# EAGLE board NextBluetooth_v1 (EAGLE 7.3.0)
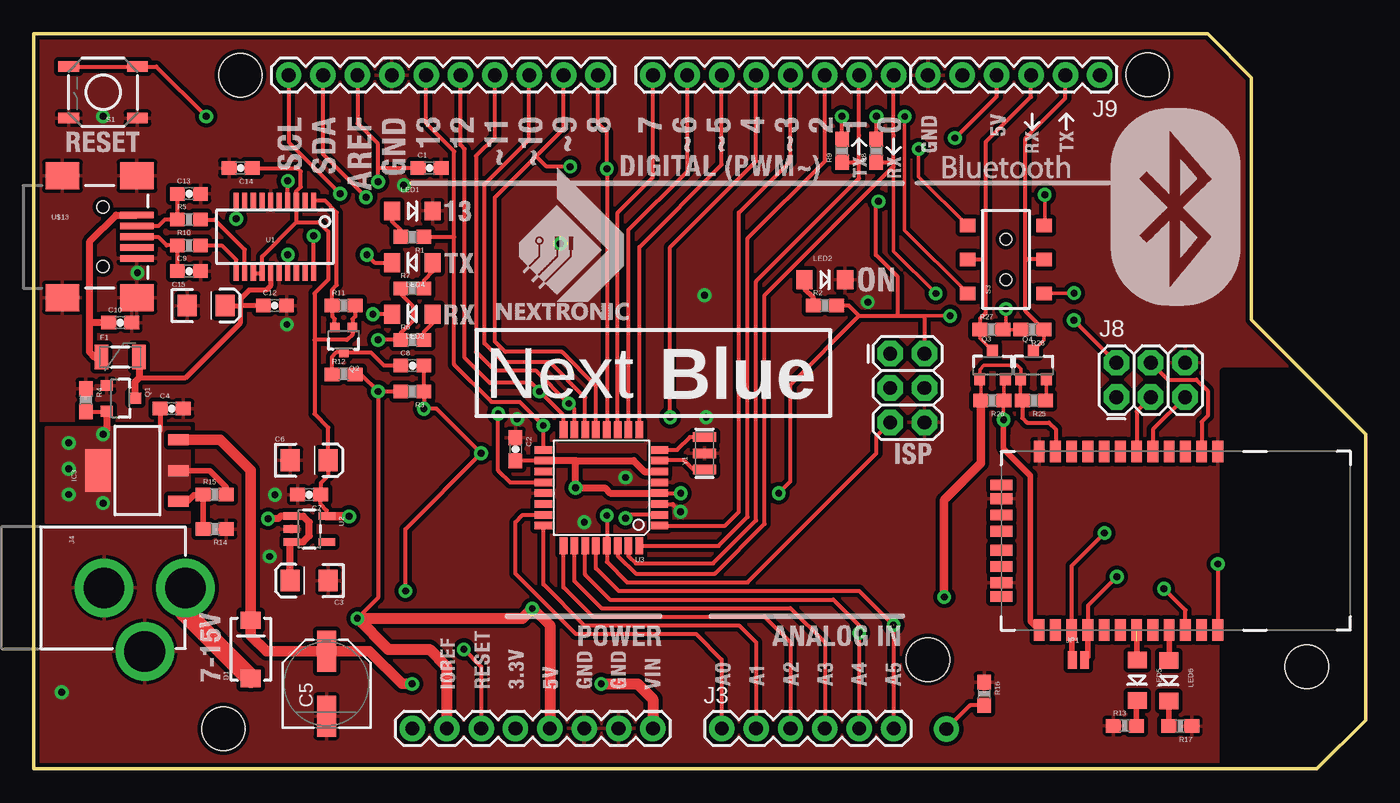
[diagram p0: board, top side]
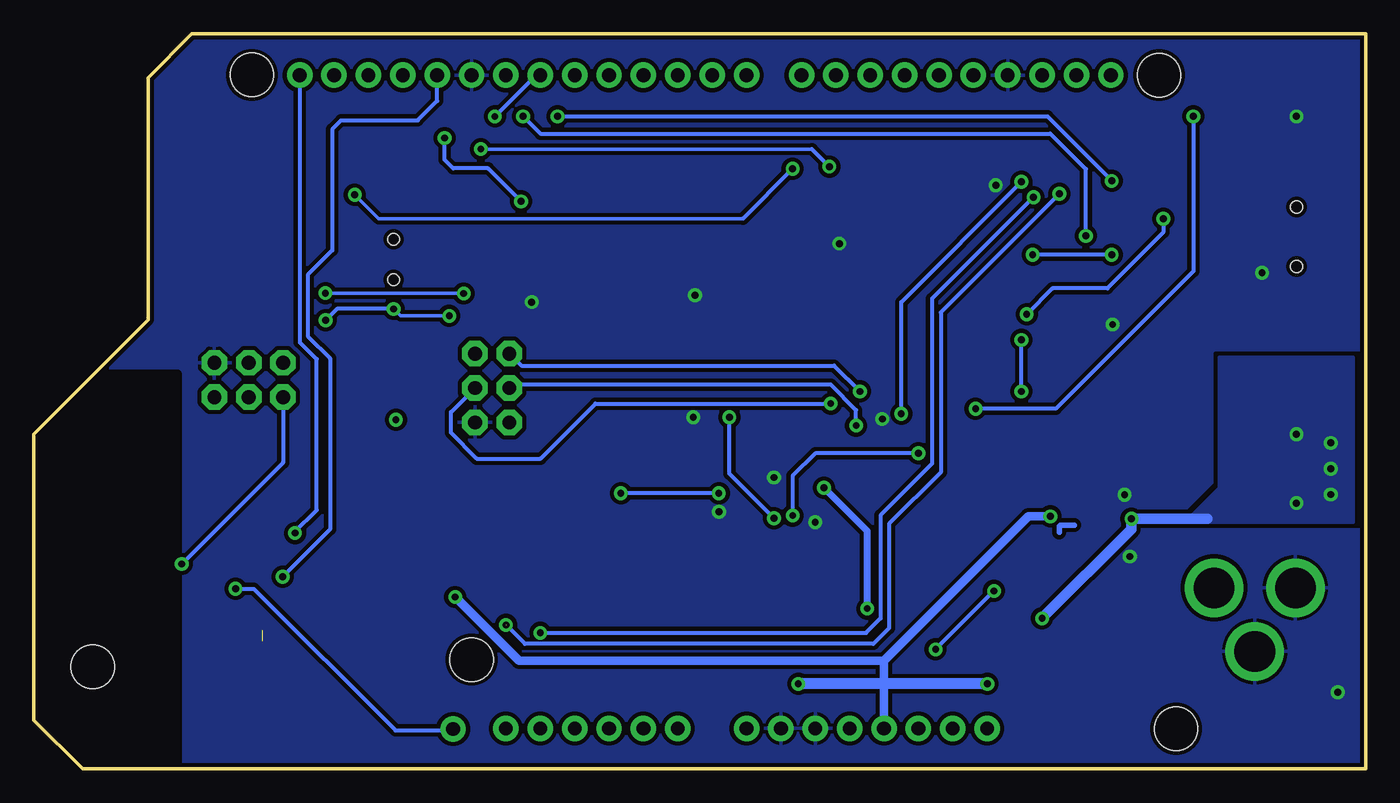
[diagram p1: board, bottom side, seen from below]

Size 98.42 x 54.31 mm. Coordinates in mm from the lower left corner, seen from the top.
Outline: 0.04,54.3 64.55,54.3
Outline: 64.57,54.31 86.74,54.31 89.97,51.08 89.97,33.2 98.42,24.74 98.42,3.61 94.82,0 0.03,0
Outline: 0,0 0,54.31 0.03,54.31
Copper layers (1*16): Top 0.035mm / dielectric 1.5mm / Bottom 0.035mm
Design rules "SparkFun-2-layer": minimum track width 7mil, minimum drill 15mil, track to track 8mil, track to pad 8mil, pad to pad 8mil, via to via 8mil, smd to smd 8mil, copper to edge 8mil, drill to drill 8mil, minimum pad ring 12mil, minimum via ring 10mil, stop-mask expansion 4mil, vias tented up to drill 20mil, thermal gap 10mil
Holes 3.2 mm at 82.31,51.28 94.07,7.54 66.08,8.07 15.28,51.25 14.01,2.97
tRestrict: area 87.9,-1.1 to 100.1,29.3
bRestrict: area 87.8,-0.6 to 99.5,29.2
vRestrict: area 0.7,22.3 to 2.1,30.6; area 5.8,23.1 to 7.4,30.6; area 47.9,10.7 to 48.5,11.2; area 50.5,10.6 to 51,11.5; area 11.3,29.3 to 12.7,31.6; area 0.3,12.9 to 9.4,25

## Footprints (pad centres in the part's own frame; a part is rotated, then mirrored left to right if it is on the bottom)
0603-CAP = smd 1.1 x 1: 1 -0.85,0; 2 0.85,0
EIA3216 = smd 1.4 x 1.6: A 1.4,0; C -1.4,0
PANASONIC_D = smd 3 x 1.4: + 2.4,0; - -2.4,0
0603-CAP@1 = smd 1.1 x 1: 1 -0.85,0; 2 0.85,0
SMA-DIODE = smd 1.27 x 1.47: A -2.15,0; C 2.15,0
PTC-1206 = smd 1 x 1.8: 1 -1.4,0; 2 1.4,0
SOT223-ALT1 = smd 0.813 x 1.524: 1 -2.271,-3.02; 2 0,-3.02; 3 2.288,-3.02 | smd 3.124 x 1.905: 4 0,2.921
1X10 = drill 1.016 pad 1.88: 1 0,0; 2 2.54,0; 3 5.08,0; 4 7.62,0; 5 10.16,0; 6 12.7,0; 7 15.24,0; 8 17.78,0; 9 20.32,0; 10 22.86,0
2X3 = drill 1.016 pad 1.88 octagon: 1 0,0; 2 0,2.54; 3 2.54,0; 4 2.54,2.54; 5 5.08,0; 6 5.08,2.54
1X06 = drill 1.016 pad 1.88: 1 0,0; 2 2.54,0; 3 5.08,0; 4 7.62,0; 5 10.16,0; 6 12.7,0
POWER_JACK_PTH = drill 2.997 pad 4.318: GND 0,7.7; GNDBREAK 4.7,10.7; PWR 0,13.7
1X08_ROUND = drill 1.016 pad 1.88: 1 0,0; 2 2.54,0; 3 5.08,0; 4 7.62,0; 5 10.16,0; 6 12.7,0; 7 15.24,0; 8 17.78,0
1X01NS-KIT = drill 1.016 pad 1.88: 1 0,0
PAD-JUMPER-2-NO_NO_SILK = smd 0.635 x 1.27: 1 -0.45,0; 2 0.45,0
LED-1206-NO_SILK = smd 1.2 x 1.4: A -1.5,0; C 1.5,0
SOT23-3 = smd 0.8 x 0.9: 1 -0.95,-1; 2 0.95,-1; 3 0,1.1
SOT323 = smd 0.7 x 0.7: 1 -0.65,-0.925; 2 0.65,-0.925; 3 0,0.925
0603-RES = smd 1.1 x 1: 1 -0.85,0; 2 0.85,0
0603-RES@2 = smd 1.1 x 1: 1 -0.85,0; 2 0.85,0
TACTILE_SWITCH_SMD = smd 1.524 x 0.762: 1 -2.54,1.905; 2 2.54,1.905; 3 -2.54,-1.905; 4 2.54,-1.905
AYZ0202 = smd 1 x 1.15: 1 -2.5,2.825; 2 0,2.825; 3 2.5,2.825; 4 -2.5,-2.825; 5 0,-2.825; 6 2.5,-2.825 | hole 0.85: 1.5,0; -1.5,0
SSOP20_L = smd 0.381 x 1.143: 1 -2.857,-2.68; 2 -2.223,-2.68; 3 -1.587,-2.68; 4 -0.953,-2.68; 5 -0.318,-2.68; 6 0.318,-2.68; 7 0.953,-2.68; 8 1.587,-2.68; 9 2.223,-2.68; 10 2.857,-2.68; 11 2.857,2.68; 12 2.223,2.68; 13 1.587,2.68; 14 0.953,2.68; 15 0.318,2.68; 16 -0.318,2.68; 17 -0.953,2.68; 18 -1.587,2.68; 19 -2.223,2.68; 20 -2.857,2.68
SOT23-5 = smd 0.55 x 1.2: 1 -0.95,-1.3; 2 0,-1.3; 3 0.95,-1.3; 4 0.95,1.3; 5 -0.95,1.3
TQFP32-08 = smd 1.27 x 0.559: 1 -4.293,2.8; 2 -4.293,2; 3 -4.293,1.2; 4 -4.293,0.4; 5 -4.293,-0.4; 6 -4.293,-1.2; 7 -4.293,-2; 8 -4.293,-2.8; 17 4.293,-2.8; 18 4.293,-2; 19 4.293,-1.2; 20 4.293,-0.4; 21 4.293,0.4; 22 4.293,1.2; 23 4.293,2; 24 4.293,2.8 | smd 0.559 x 1.27: 9 -2.8,-4.293; 10 -2,-4.293; 11 -1.2,-4.293; 12 -0.4,-4.293; 13 0.4,-4.293; 14 1.2,-4.293; 15 2,-4.293; 16 2.8,-4.293; 25 2.8,4.293; 26 2,4.293; 27 1.2,4.293; 28 0.4,4.293; 29 -0.4,4.293; 30 -1.2,4.293; 31 -2,4.293; 32 -2.8,4.293
RN41 = smd 0.8 x 1.6: 1 -6.6,-6.6; 2 -5.4,-6.6; 3 -4.2,-6.6; 4 -3,-6.6; 5 -1.8,-6.6; 6 -0.6,-6.6; 7 0.6,-6.6; 8 1.8,-6.6; 9 3,-6.6; 10 4.2,-6.6; 11 5.4,-6.6; 12 6.6,-6.6; 13 6.6,6.6; 14 5.4,6.6; 15 4.2,6.6; 16 3,6.6; 17 1.8,6.6; 18 0.6,6.6; 19 -0.6,6.6; 20 -1.8,6.6; 21 -3,6.6; 22 -4.2,6.6; 23 -5.4,6.6; 24 -6.6,6.6 | smd 1.6 x 0.8: 28 9.4,3.1; 29 9.4,-3.1; 30 9.4,4.122; 31 9.4,1.9; 32 9.4,0.7; 33 9.4,-0.7; 34 9.4,-1.9; 35 9.4,-4.122
USB-MINIB = smd 2.5 x 0.5: D+ 2.5,0; D- 2.5,0.8; GND 2.5,-1.6; ID 2.5,-0.8; VBUS 2.5,1.6 | smd 2.5 x 2: MTN1 -3,4.5; MTN2 2.5,4.5; MTN3 -3,-4.5; MTN4 2.5,-4.5 | hole 0.9: 0,2.2; 0,-2.2
RESONATOR-SMD = smd 0.7 x 1.7: 1 -1.2,0; 2 0,0; 3 1.2,0

## Placement (x,y rotation side)
C1  0.1uF  [0603-CAP]  29.25,44.39 0 top
C2  0.1uF  [0603-CAP]  35.6,23.62 270 top
C3  10uF  [EIA3216]  20.36,13.91 180 top
C4  0.1uF  [0603-CAP]  10.2,26.61 0 top
C5  47uF  [PANASONIC_D]  21.63,6.29 90 top
C6  10uF  [EIA3216]  20.36,22.8 0 top
C7  1uF  [0603-CAP]  20.36,20.26 180 top
C8  0.1uF  [0603-CAP]  27.98,29.79 0 top
C9  47pF  [0603-CAP@1]  11.47,36.77 0 top
C10  0.1uF  [0603-CAP]  6.39,32.96 0 top
C12  0.1uF  [0603-CAP]  17.82,34.23 0 top
C13  47pF  [0603-CAP@1]  11.47,42.49 0 top
C14  0.1uF  [0603-CAP]  15.28,44.39 180 top
C15  10uF  [EIA3216]  12.74,34.23 0 top
D1  MBRA140  [SMA-DIODE]  16.04,8.83 90 top
F1  500mA  [PTC-1206]  6.39,30.42 0 top
FRAME1  FRAME-LETTER  [CREATIVE_COMMONS]  -24.45,-9.76 0 top  (outside the outline)
IC3  LM1117  [SOT223-ALT1]  7.66,22.04 90 top
J1  [1X10]  41.69,51.25 180 top
J2  ICSP  [2X3]  63.28,30.68 270 top
J3  [1X06]  50.84,2.99 0 top
J4  POWER_JACKPTH  [POWER_JACK_PTH]  -2.5,13.38 270 top
J5  [1X08_ROUND]  63.54,51.25 180 top
J6  [1X01NS-KIT]  67.44,2.95 0 top
J7  [1X08_ROUND]  27.98,2.99 0 top
J8  ICSP  [2X3]  80,27.47 0 top
J9  [1X06]  78.78,51.25 180 top
JP1  JUMPER-PAD-2-NO  [PAD-JUMPER-2-NO_NO_SILK]  77.2,8.05 0 top
LED1  Blue  [LED-1206-NO_SILK]  27.98,41.22 0 top
LED2  Green  [LED-1206-NO_SILK]  58.46,36.14 0 top
LED3  Red  [LED-1206-NO_SILK]  27.98,33.6 180 top
LED4  Yellow  [LED-1206-NO_SILK]  27.98,37.41 180 top
LED5  Green  [LED-1206-NO_SILK]  81.54,6.55 270 top
LED6  Red  [LED-1206-NO_SILK]  83.87,6.52 270 top
Q1  ZXMP6A13FTA  [SOT23-3]  6.39,27.38 270 top
Q2  2N7002PW  [SOT323]  22.9,31.69 180 top
Q3  BSS138  [SOT23-3]  70.85,29.79 0 top
Q4  BSS138  [SOT23-3]  73.87,29.79 0 top
R1  1k  [0603-RES]  27.98,39.31 180 top
R2  1k  [0603-RES]  58.46,34.23 0 top
R3  10k  [0603-RES]  27.98,27.88 180 top
R4  10k  [0603-RES]  3.85,27.25 270 top
R5  27  [0603-RES]  11.47,40.58 0 top
R6  1k  [0603-RES]  27.98,31.69 0 top
R7  1k  [0603-RES]  27.98,35.5 0 top
R8  1k  [0603-RES]  62.27,45.66 90 top
R9  1k  [0603-RES]  59.73,45.66 90 top
R10  27  [0603-RES]  11.47,38.68 0 top
R11  10k  [0603-RES]  22.9,34.23 0 top
R12  10k  [0603-RES]  22.9,29.15 0 top
R13  240  [0603-RES]  80.63,3.19 0 top
R14  715  [0603-RES]  13.37,17.72 180 top
R15  240  [0603-RES]  13.37,20.26 0 top
R16  10K  [0603-RES]  70.23,5.55 270 top
R17  240  [0603-RES]  84.72,3.16 180 top
R25  10K  [0603-RES@2]  73.9,27.22 180 top
R26  10K  [0603-RES@2]  70.83,27.22 180 top
R27  10K  [0603-RES@2]  70.77,32.46 0 top
R28  10K  [0603-RES@2]  73.8,32.46 180 top
S1  RESET  [TACTILE_SWITCH_SMD]  5.12,49.98 180 top
S3  DPDT  [AYZ0202]  71.84,37.64 90 top
U1  FT231XS  [SSOP20_L]  17.82,39.31 180 top
U2  MIC5205  [SOT23-5]  20.36,17.72 270 top
U3  ATMEGA328  [TQFP32-08]  41.95,20.77 180 top
U$9  BLUETOOTH-RN41"  [RN41]  80.9,16.86 180 top
U$13  USB-MINIB-5PIN  [USB-MINIB]  5.12,39.31 0 top
Y1  16MHz  [RESONATOR-SMD]  49.57,23.31 90 top

## Library data of the parts
C1 C2 C4 C8 C10 C12 C14 = SparkFun; MF: WALSIN; MPN: 0805B104K500CT; OC_FARNELL: 2496944
C3 C6 = SparkFun; MF: MULTICOMP; MPN: MCSH21B104K101CT; OC_FARNELL: 1856515
C5 = SparkFun; MF: PANASONIC ELECTRONIC COMPONENTS; MPN: EEEFT1H470AP; OC_FARNELL: 1868425
C7 = SparkFun; MF: PANASONIC ELECTRONIC COMPONENTS; MPN: ECA2GHG2R2; OC_FARNELL: 9693327
C9 C13 = SparkFun-Capacitors; MF: AVX; MPN: 08051A470JAT2A; OC_FARNELL: 499160; PROD_ID: CAP-08913
C15 = SparkFun-Capacitors; MF: MULTICOMP; MPN: MCSH21B104K101CT; OC_FARNELL: 1856515
D1 = SparkFun; MF: DIODES INC.; MPN: B140-13-F; OC_FARNELL: 1843670
F1 = SparkFun; MF: MULTICOMP; MPN: 1N4148.; OC_FARNELL: 9565124
FRAME1 = SparkFun-Aesthetics; OC_FARNELL: unknown
IC3 = Testing; MF: STMICROELECTRONICS; MPN: LD1117S33TR; OC_FARNELL: 1202826
J1 = SparkFun-Connectors; OC_FARNELL: unknown; PROD_ID: CONN-11563
J2 J6 J8 U$13 = SparkFun-Connectors; OC_FARNELL: unknown
J3 J5 J7 J9 = SparkFun-Connectors; OC_FARNELL: unknown; PROD_ID: CONN-08437
J4 = SparkFun-Connectors; OC_FARNELL: unknown; PROD_ID: CONN-08197
JP1 = SparkFun-Passives; OC_FARNELL: unknown
LED1-LED3 LED5 LED6 = SparkFun-LED; MF: MULTICOMP; MPN: 703-1028; OC_FARNELL: 2112143
LED4 = SparkFun-LED; MF: VISHAY; MPN: TLUY2401; OC_FARNELL: 1045498
Q1 = SparkFun; MF: DIODES INC.; MPN: ZXMP6A13FTA; OC_FARNELL: 1843770
Q2 = SparkFun-DiscreteSemi; MF: NXP; MPN: 2N7002PW; OC_FARNELL: 1829184; PROD_ID: TRANS-11151
Q3 Q4 = SparkFun-DiscreteSemi; MF: NXP; MPN: BSS138PW; OC_FARNELL: 1907611; PROD_ID: TRANS-00830
R1 R2 R6-R9 = SparkFun; MF: PANASONIC ELECTRONIC COMPONENTS; MPN: ERA6AEB102V; OC_FARNELL: 1577659
R3 R4 R11 R12 = SparkFun; MF: MULTICOMP; MPN: MC0063W0603510K; OC_FARNELL: 9331700
R5 R10 = SparkFun-Resistors; MF: MOLEX; MPN: 22-27-2021; OC_FARNELL: 9731148
R13 R17 = SparkFun-Resistors; MF: MULTICOMP; MPN: MCMR06X2200FTL; OC_FARNELL: 2073428
R14 = SparkFun; MF: YAGEO (PHYCOMP); MPN: RC0603JR-07150RL; OC_FARNELL: 9233270
R15 = SparkFun; MF: MULTICOMP; MPN: MCMR06X2200FTL; OC_FARNELL: 2073428
R16 = SparkFun-Resistors; MF: SUSUMU; MPN: RR0816P-103-B-T5; OC_FARNELL: 1653253
R25-R28 = SparkFun-Resistors; MF: SUSUMU; MPN: RR0816P-103-B-T5; OC_FARNELL: 1653253; PROD_ID: RES-00824
S1 = SparkFun; OC_FARNELL: unknown
S3 = SparkFun-Electromechanical; OC_FARNELL: unknown; PROD_ID: SWCH-08179
U1 = SparkFun-DigitalIC; MF: FTDI; MPN: FT231XS; OC_FARNELL: 2081328RL
U2 = SparkFun; MF: MICREL SEMICONDUCTOR; MPN: MIC5205-5.0YM5 TR; OC_FARNELL: 1556768
U3 = SparkFun; MF: ATMEL; MPN: ATMEGA328P-AN; OC_FARNELL: 2443178
U$9 = SparkFun-RF; OC_FARNELL: unknown
Y1 = SparkFun-FreqCtrl; OC_FARNELL: unknown

## Nets
3.3V: C6.A C7.1 C14.1 J7.4 Q2.1 Q3.1 Q4.1 R11.2 R25.2 R26.2 U1.3 U1.13 U1.14 U2.5 U$9.11
5V: C2.2 C3.A C4.1 IC3.2 IC3.4 J2.2 J7.2 J7.5 J8.2 J9.4 Q1.2 R2.2 R3.2 R4.2 R6.1 R7.1 R12.2 R15.2 R27.2 R28.2 U2.1 U2.3 U3.4 U3.6 U3.18
AD0: J3.1 U3.23
AD1: J3.2 U3.24
AD2: J3.3 U3.25
AD3: J3.4 U3.26
AD4/SDA: J1.9 J3.5 U3.27
AD5/SCL: J1.10 J3.6 U3.28
AREF: C1.1 J1.8 U3.20
BLRXI: Q3.2 R26.1 U$9.13
BLTXO: Q4.2 R25.1
BTCTS: J9.5 JP1.2 U$9.16
BTMISO: J8.1 U$9.24
BTMOSI: J8.4 U$9.2
BTRESET: J8.5 U$9.5
BTRTS: J9.1 JP1.1 U$9.15
BTSCK: J8.3 U$9.6
BTTXO: U$9.14
D+: C9.1 R10.1 U$13.D+
D-: C13.1 R5.1 U$13.D-
DTR: C8.1 Q2.3 R12.1
GND: C1.2 C2.1 C3.C C4.2 C5.- C6.C C7.2 C9.2 C10.2 C12.2 C13.2 C14.2 C15.C J1.7 J2.6 J4.GND J4.GNDBREAK J7.6 J7.7 J8.6 J9.6 LED1.C LED2.C Q1.1 R4.1 R13.1 R14.1 R16.1 R17.1 S1.1 S1.2 U1.6 U1.16 U2.2 U3.3 U3.5 U3.21 U$9.1 U$9.12 U$9.28 U$9.29 U$13.GND U$13.MTN1 U$13.MTN2 U$13.MTN3 U$13.MTN4 Y1.2
IO2: J5.3 U3.32
IO3: J5.4 U3.1
IO4: J5.5 U3.2
IO5: J5.6 U3.9
IO6: J5.7 U3.10
IO7: J5.8 U3.11
IO8: J1.1 S3.6 U3.12
IO9: J1.2 S3.3 U3.13
MISO: J1.5 J2.1 U3.16
MOSI: J1.4 J2.4 U3.15
N$1: LED1.A R1.2
N$2: LED2.A R2.1
N$3: U3.7 Y1.1
N$4: U3.8 Y1.3
N$5: D1.A J4.PWR
N$6: R5.2 U1.12
N$7: R10.2 U1.11
N$8: LED3.A R6.2
N$10: LED4.A R7.2
N$11: U$9.23
N$12: Q2.2 R11.1 U1.1
N$15: IC3.1 R14.2 R15.1
N$17: U$9.7
N$18: U$9.8
N$19: U$9.9
N$20: U$9.10
N$21: U$9.18
N$22: U$9.17
N$23: U$9.34
N$24: U$9.33
N$25: U$9.32
N$26: U$9.31
N$27: U$9.4
N$28: U$9.3
N$29: LED6.A U$9.21
N$30: J6.1 R16.2 U$9.22
N$31: U$9.20
N$32: LED5.A U$9.19
N$33: U$9.30
N$34: U$9.35
N$35: LED5.C R13.2
N$36: LED6.C R17.2
RESET: C8.2 J2.5 J7.3 R3.1 S1.3 S1.4 U3.29
RX-I: J5.1 R8.1 S3.4 U3.30
RX_HIGH: J9.3 Q3.3 R27.1 S3.2
RXD: R9.2 U1.4
RXLED: LED4.C U1.17
SCK: J1.6 J2.3 R1.1 U3.17
SS: J1.3 U3.14
TX-O: J5.2 R9.1 S3.1 U3.31
TX_HIGH: J9.2 Q4.3 R28.1 S3.5
TXD: R8.2 U1.20
TXLED: LED3.C U1.10
USBVCC: C12.1 C15.A F1.2 Q1.3 U1.15
VIN: C5.+ D1.C IC3.3 J7.8
VUSB: C10.1 F1.1 U$13.VBUS

## Tracks (layer width: path | path; a pad name or v marks a point on that pad's centre or on a via)
3.3V  (via drill 0.5)
  Top 0.254: R26.2 69.98,28.71 Q3.1 69.9,29.5 70.22,29.81 72.68,29.81 72.93,29.56 Q4.1 72.92,27.35 R25.2
  Top 0.305: U2.5 21.66,19.09 21.21,19.54 C7.1 21.21,21.11 21.76,21.66 C6.A 21.76,25.21 20.74,26.23 20.74,31.69 | R11.2 23.75,33.43 23.55,33.23 Q2.1 23.55,32.09 23.15,31.69 20.74,31.69 | 19.4,40.39 U1.3 19.4,42.68 19.72,43 19.72,44.14 19.47,44.39 C14.1 | U1.13 U1.14 16.86,37.85 19.4,40.39 | 19.4,40.39 21.05,40.39 21.76,39.69 21.76,36.14 20.74,35.12 20.74,31.69 | R25.2 73.05,25.94 73.41,25.58 75.03,25.58 75.51,25.1 75.51,23.47 U$9.11
  Top 0.61: U2.5 23.29,18.67 v23.3,18.66 | R26.2 69.98,22.58 67.24,19.85 67.24,12.75 v67.28,12.71
  Bottom 0.61: v23.3,18.66 24.92,18.66 35.59,7.99 | 35.59,7.99 35.59,3 J7.4 | 35.59,7.99 62.57,7.99 v67.28,12.71
5V  (via drill 0.5, 0.51)
  Top 0.254: R28.2 R27.2 71.84,32.67 v71.84,33.98 | 65.82,33.47 v67.73,33.47
  Top 0.305: U3.18 C2.2 | U3.4 v47.81,20.37 | 61,33.47 63.84,33.47 | 63.84,33.47 65.82,33.47 J2.2 | 61,33.47 60.23,34.23 R2.2 | v55.05,20.37 55.92,21.24 55.92,28.39 61,33.47 | v25.44,27.88 25.44,12.64 v23.91,11.12 | v25.44,31.69 R6.1 27.13,32.24 27.98,33.09 27.98,34.23 27.13,35.08 R7.1 | v25.44,27.88 R3.2 | R4.2 5.36,26.4 Q1.2 | R12.2 24.17,29.15 v25.44,27.88 | 63.84,33.47 63.84,36.34 62.21,37.97 62.21,41.73 v62.42,41.93 | v68.07,46.61 71.16,49.69 J9.4 | v76.86,33.15 J8.2
  Top 0.356: C4.1 9.35,25
  Top 0.406: IC3.2 12.99,22.04 14.22,20.81 R15.2 | C3.A 19.09,13.91
  Top 0.508: U3.6 45.12,21.97 44.32,22.77 40.04,22.77 | 40.04,22.77 U3.18 | 40.04,22.77 v40.04,20.77 42.2,20.77 42.6,20.37 U3.4 | C3.A 18.96,16.67 U2.3 19.91,16.77 20.36,17.22 20.36,18.23 19.91,18.67 U2.1 18.26,18.67 18.07,18.49 v17.31,18.49 | Q1.2 5.39,24.99 v5.12,24.72
  Top 0.762: v36.84,11.85 36.84,11.91 38.14,10.61
  Top 0.813: v36.84,11.85 36.1,11.12 v23.91,11.12 26.2,8.83 29.25,8.83 30.52,7.56 J7.2 | 38.14,10.61 J7.5
  Bottom 0.254: v67.73,33.47 71.33,33.47 v71.84,33.98
  Bottom 0.305: v47.81,20.37 v55.05,20.37 | v25.44,27.88 v25.44,31.69 | v62.42,41.93 64.86,44.37 67.44,44.37 68.07,45.01 v68.07,46.61 | v71.84,33.98 76.03,33.98 v76.86,33.15
  Bottom 0.508: v36.84,11.85 36.84,17.57 v40.04,20.77
  Bottom 0.762: v17.31,18.49 11.72,18.49 | 16.55,18.49 v17.31,18.49 | v23.91,11.12 17.31,17.72 v17.31,18.49
  other vias: 2.58,22.18 5.12,19.64 2.58,20.28 2.58,24.09
  pour Bottom (isolate 0.305, no thermals): 0.92,30.42 10.83,30.42 10.83,20.77 12.74,18.87 12.74,18.23 0.92,18.23
  pour Top (isolate 0.305, no thermals): 0.92,18.23 0.92,25.22 11.47,25.22 11.47,18.23
AD0
  Top 0.305: U3.23 36.14,18.77 35.6,18.23 35.6,14.42 40.04,9.98 48.93,9.98 50.84,8.07 J3.1
AD1
  Top 0.305: U3.24 37.65,13.63 40.68,10.61 52.11,10.61 53.38,9.34 J3.2
AD2
  Top 0.305: U3.25 39.15,13.41 41.31,11.25 54.01,11.25 55.92,9.34 J3.3
AD3
  Top 0.305: U3.26 39.95,13.88 41.95,11.88 55.92,11.88 58.46,9.34 J3.4
AD4/SDA  (via drill 0.5, 0.51)
  Top 0.305: U3.27 40.75,14.35 42.58,12.52 59.09,12.52 61,10.61 v61,10.05 J3.5 | v24.55,42.24 21.37,45.41 J1.9
  Bottom 0.305: v24.55,42.24 32.04,34.74 32.04,22.55 35.85,18.74 35.85,11.12 36.92,10.05 v61,10.05
AD5/SCL  (via drill 0.5, 0.51)  (1 unrouted)
  Top 0.305: U3.28 41.55,14.82 43.22,13.15 61,13.15 63.54,10.61 | J1.10 18.83,46.3 v22.64,42.49 | v63.54,10.64 J3.6
  Bottom 0.305: v22.64,42.49 31.4,33.73 31.4,21.92 35.21,18.11 35.21,10.41 36.38,9.24 62.14,9.24 v63.54,10.64
AREF  (via drill 0.51)
  Top 0.305: U3.20 35.2,21.17 34.33,22.04 v34.33,26.23 | J1.8 23.91,47.7 25.44,46.17 25.44,44.39 | v25.44,43.38 25.44,44.39 | C1.1 25.44,44.39
  Bottom 0.305: v25.44,43.38 34.33,34.49 v34.33,26.23
BLRXI  (via drill 0.5)
  Top 0.254: 71.8,27.07 R26.1 | Q3.2 71.68,28.66 R26.1 | R26.1 71.66,27.21 v71.66,25.8
  Top 0.406: 71.66,24.86 v71.66,25.8 71.66,23.66 73.66,21.67 73.66,10.89 U$9.13
BLTXO
  Top 0.254: Q4.2 74.82,26.99 R25.1
BTCTS  (via drill 0.5)
  Top 0.305: v80.04,14.2 77.9,12.06 77.9,9.75
  Top 0.406: U$9.16 77.9,9.75 77.9,8.3 JP1.2
  Bottom 0.305: v80.04,14.2 76.53,17.7 76.53,30.33 78.18,31.98 78.18,36.5 76.38,38.3 76.38,47.24 75.72,47.9 70.05,47.9 68.61,49.35 68.61,51.24 J9.5
BTMISO  (via drill 0.5)
  Top 0.305: v87.5,15.14 U$9.24
  Bottom 0.305: J8.1 80,22.64 v87.5,15.14
BTMOSI
  Top 0.305: J8.4 83.8,28.75 85.93,28.75 86.74,27.94 86.74,26.09 86.3,25.64 U$9.2
BTRESET
  Top 0.305: J8.5 82.7,25.08 U$9.5
BTRTS  (via drill 0.5)
  Top 0.305: U$9.15 76.7,15 v79.12,17.42
  Top 0.406: U$9.15 76.7,8.1 JP1.1
  Bottom 0.305: 79.17,17.48 77.52,19.13 77.52,30.28 78.77,31.52 78.77,51.24 J9.1
  Bottom 0.406: v79.12,17.42 79.17,17.48 | 78.79,51.24 J9.1
BTSCK
  Top 0.305: J8.3 81.5,26.42 U$9.6
D+
  Top 0.305: R10.1 10.62,38.89 | U$13.D+ 9.18,39.31 9.81,38.68 R10.1 | C9.1 R10.1
D-
  Top 0.305: U$13.D- 9.22,40.11 9.69,40.58 R5.1 C13.1
DTR
  Top 0.305: R12.1 22.05,30.46 22.35,30.77 Q2.3 24.89,30.77 25.87,29.79 C8.1
GND  (via drill 0.5, 0.51)
  Top 0.305: U3.3 47.21,19.57 v47.79,18.99
  other vias: 5.12,48.2 61.63,34.49 40.68,18.23 43.72,21.53 49.69,25.98 35.72,25.85 2.07,5.66 7.66,36.65 27.34,43.12 18.7,32.84 17.82,20.26 17.43,15.69 49.57,35 38.9,38.81
  pour Top (isolate 0.305, rank 2): 0.04,54.3 86.73,54.33 86.73,54.32 90.12,50.93 90.12,33.07 98.5,24.69 98.5,3.58 94.96,-0.03 93.63,-0.06 0.04,-0.06
  pour Bottom (isolate 0.305, rank 2): 0.04,54.3 86.8,54.38 90.1,50.74 90.08,33.14 98.51,24.68 98.56,3.53 94.93,-0.06 0.04,-0.06
IO2
  Top 0.305: U3.32 50.61,16.48 52.74,18.61 52.74,39.19 58.46,44.9 J5.3
IO3
  Top 0.305: U3.1 51.08,17.97 52.11,18.99 52.11,41.09 55.92,44.9 J5.4
IO4  (via drill 0.51)
  Top 0.305: v47.03,25.98 47.03,38.55 53.38,44.9 J5.5 | U3.2 43.98,18.77 v43.72,18.52
  Bottom 0.305: v43.72,18.52 47.03,21.82 v47.03,25.98
IO5
  Top 0.305: U3.9 44.75,38.55 50.84,44.64 J5.6
IO6
  Top 0.305: U3.10 43.95,39.82 48.3,44.17 J5.7
IO7
  Top 0.305: U3.11 43.15,41.09 45.76,43.7 J5.8
IO8  (via drill 0.5)
  Top 0.254: v74.71,42.41 74.71,40.18 S3.6
  Top 0.305: J1.1 41.69,47.7 42.35,47.04 v42.35,44.34 U3.12
  Bottom 0.254: 46.03,40.66 72.96,40.66 v74.71,42.41
  Bottom 0.305: 46.03,40.66 v42.35,44.34
IO9  (via drill 0.5)
  Top 0.254: 69.01,40.13 S3.3 65.39,43.76 v65.39,45.79
  Top 0.305: J1.2 39.15,47.3 37.13,45.27 | U3.13 41.55,28.28 39.02,30.81 34.83,30.81 34.07,31.57 34.07,42.22 37.13,45.27 | v39.63,44.5 37.91,44.5 37.13,45.27
  Bottom 0.254: 40.93,45.79 v65.39,45.79
  Bottom 0.305: 40.93,45.79 v39.63,44.5
MISO  (via drill 0.51)
  Top 0.305: U3.16 39.15,26.11 v37.37,27.88 36.74,28.52 33.69,28.52 31.84,30.37 31.84,45.79 31.53,46.1 J1.5
  Bottom 0.305: v37.37,27.88 39.28,29.79 62.39,29.79 J2.1
MOSI  (via drill 0.51)
  Top 0.305: U3.15 39.95,26.58 v39.53,27 37.12,29.41 34.07,29.41 32.67,30.81 32.67,45.28 34.07,46.68 J1.4
  Bottom 0.305: v39.53,27 56.93,27 61,22.93 65.69,22.93 67.6,24.84 67.6,26.36 J2.4
N$1
  Top 0.305: R1.2 27.13,39.78 26.48,40.43 LED1.A
N$2
  Top 0.356: R2.1 57.61,34.83 56.96,35.48 LED2.A
N$3
  Top 0.305: Y1.1 48.73,22.11 48.04,22.8 46.21,22.8 | 45.76,22.8 46.21,22.8 | 46.21,22.8 U3.7
N$4
  Top 0.305: U3.8 47.54,23.57 48.48,24.51 Y1.3
N$5
  Top 1.422: J4.PWR 11.2,11.53 D1.A
N$6
  Top 0.305: R5.2 13.37,40.58 15.59,38.36 U1.12
N$7
  Top 0.305: U1.11 14.96,37.6 13.88,38.68 R10.2
N$8
  Top 0.305: R6.2 28.83,32.29 29.48,32.94 LED3.A
N$10
  Top 0.305: LED4.A 29.48,36.75 28.83,36.1 R7.2
N$12
  Top 0.305: Q2.2 22.25,33.23 22.05,33.43 R11.1 22.05,35.42 22.39,35.76 22.39,41.09 21.49,41.99 U1.1
N$15
  Top 0.406: IC3.1 11.35,19.77 11.85,20.26 R15.1 R14.2
N$29
  Top 0.406: U$9.21 83.9,8.05 LED6.A
N$30  (via drill 0.5)
  Top 0.305: U$9.22 85.1,11.73 v83.51,13.31 | R16.2 69.19,4.7 J6.1
  Top 0.406: U$9.22 85.1,10.58
  Bottom 0.305: v83.51,13.31 82.17,13.31 71.7,2.84 67.55,2.84 J6.1
N$32  (1 unrouted)
  Top 0.406: 81.5,9.43 81.5,8.09 LED5.A
N$35
  Top 0.406: LED5.C 81.49,4.76 R13.2
N$36
  Top 0.406: LED6.C 83.9,4.74 R17.2
N$37
  Bottom 0.406: 21.54,18.01 22.57,18.01 22.57,17.92 22.64,17.92 22.64,17.47
RESET  (via drill 0.5, 0.51)
  Top 0.305: v42.35,18.72 U3.29 42.35,15.29 43.85,13.79 52.74,13.79 62.27,23.31 62.27,24.58 J2.5 | S1.4 S1.3 9.05,51.89 v12.74,48.2 | C8.2 R3.1 v28.83,26.61 29.75,26.61 v33.06,23.31 27.47,17.72 v27.47,13.15 | v31.79,8.83 33.06,7.56 J7.3
  Bottom 0.305: v42.35,18.72 42.35,21.64 40.68,23.31 v33.06,23.31 | v12.74,48.2 12.74,36.77 22.9,26.61 v28.83,26.61 | v31.79,8.83 v27.47,13.15
RX-I  (via drill 0.5)
  Top 0.254: 63.54,46.81 63.55,46.82 | 63.54,44.52 63.54,38.25 v66.66,35.12 | v76.87,35.15 S3.4
  Top 0.305: 63.54,44.78 63.54,44.52 54.01,35 54.01,18.11 50.33,14.42 44.49,14.42 43.15,15.76 U3.30 | 63.54,44.78 63.54,46.81 J5.1 | R8.1 63.5,44.81 63.54,44.78
  Bottom 0.254: v66.66,35.12 76.84,35.12 v76.87,35.15
RX_HIGH
  Top 0.254: R27.1 69.92,31.82 Q3.3
  Top 0.305: J9.3 73.69,51.24 73.69,49.66 70.36,46.33 70.36,37.54 | 70.36,37.54 70.36,33.71 69.92,33.27 R27.1 | S3.2 70.26,37.64 70.36,37.54
RXD  (via drill 0.51)
  Top 0.305: R9.2 v59.73,48.2 | U1.4 v18.77,43.44
  Bottom 0.305: v59.73,48.2 23.53,48.2 v18.77,43.44
RXLED  (via drill 0.51)
  Top 0.305: U1.17 v18.77,37.98 | v24.61,37.98 25.18,37.41 LED4.C
  Bottom 0.305: v18.77,37.98 v24.61,37.98
SCK  (via drill 0.51)
  Top 0.305: U3.17 v37.65,25.37 35.9,27.12 33.82,27.12 31.07,29.87 31.07,39.31 | R1.1 31.07,39.31 | 31.07,39.31 31.07,45.61 28.99,47.7 J1.6
  Bottom 0.305: v37.65,25.37 37.65,26.51 39.53,28.39 63.03,28.39 J2.3
SS
  Top 0.305: J1.3 36.61,46.5 33.31,43.19 33.31,31.44 34.71,30.04 38.14,30.04 40.75,27.43 U3.14
TX-O  (via drill 0.5)
  Top 0.254: 61,46.81 60.98,46.82 | S3.1 64.35,39.81 v64.35,48.2
  Top 0.305: U3.31 43.95,15.72 44.49,15.18 50.2,15.18 53.38,18.36 53.38,36.01 61,43.63 61,44.78 | 61,44.78 61,46.81 J5.2 | R9.1 60.96,44.81 61,44.78
  Bottom 0.254: J5.2 61.05,51.25
  Bottom 0.305: 61.05,51.25 61.3,51.25 v64.35,48.2
TX_HIGH
  Top 0.254: R28.1 74.65,31.66 Q4.3
  Top 0.305: J9.2 76.23,51.24 76.23,49.53 73.29,46.59 73.29,37.54 | 73.29,37.54 73.29,33.81 R28.1 | S3.5 73.39,37.64 73.29,37.54
TXD  (via drill 0.51)
  Top 0.305: R8.2 v62.27,48.2 | U1.20 v20.67,39.38
  Bottom 0.305: v62.27,48.2 61,46.93 23.3,46.93 20.67,44.3 v20.67,39.38
TXLED  (via drill 0.51)
  Top 0.305: U1.10 v14.96,40.65 | LED3.C v25.05,33.6
  Bottom 0.305: v14.96,40.65 14.96,39.63 19.09,35.5 23.15,35.5 v25.05,33.6
USBVCC
  Top 0.356: C15.A 15.28,34.23 | U1.15 17.5,35.69 17.18,35.38 15.91,35.38 15.28,34.74 15.28,34.23 | C12.1 15.28,34.23 | 7.79,28.9 11.21,28.9 15.28,32.96 15.28,34.23
  Top 0.508: F1.2 7.79,28.9 7.49,28.6 Q1.3
VIN  (via drill 0.51)
  Top 0.762: v27.96,6.28 27.21,6.28 24.8,8.69 C5.+ 17.19,8.69 16.04,9.85 D1.C 16.04,22.05 13.75,24.33 IC3.3
  Top 0.813: v41.93,6.28 44.63,6.28 45.76,5.15 J7.8
  Bottom 0.813: v27.96,6.28 v41.93,6.28
VUSB
  Top 0.508: 4.1,32.96 4.1,38.93 6.08,40.91 U$13.VBUS | C10.1 4.1,32.96 | 4.1,32.96 4.1,30.81 4.48,30.42 F1.1

## Text on the board
tPlace: Next | Blue | C:/Users/My/Desktop/blue.bmp | C:/Users/My/Desktop/blue.bmp
214bmp: D:/SmartProjects/Snc/a4_bn_logo2.bmp